# Altium PCB Placa.PcbDoc
Units mm, origin at the board's own origin, x right, y up, seen from the top; angles counter-clockwise.
Board outline 167.5 x 142.5 mm, 2 copper layers (Top Layer, Bottom Layer); 43 components, 45 nets, 168 pads, 17 vias.
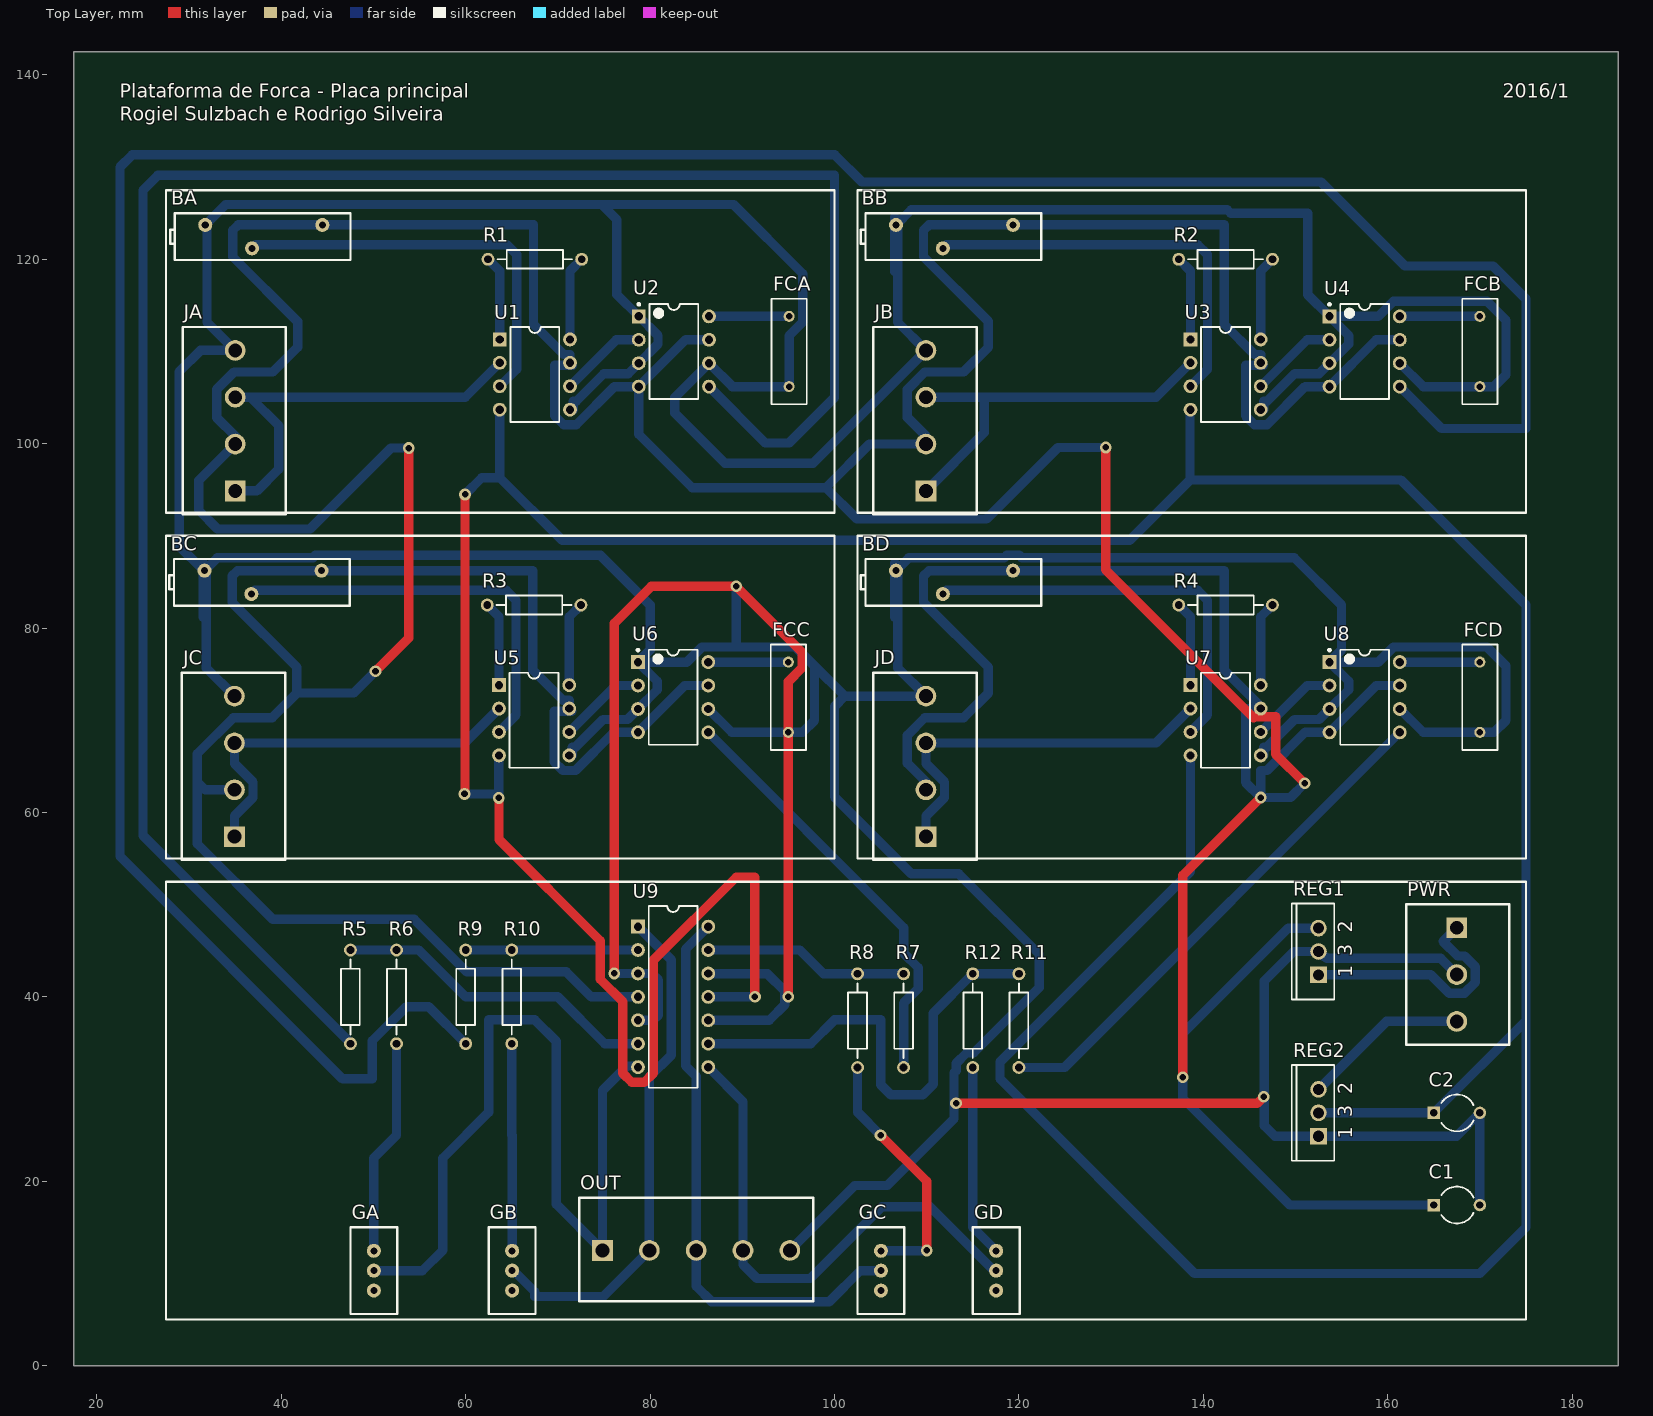
[diagram p0: Top Layer view]
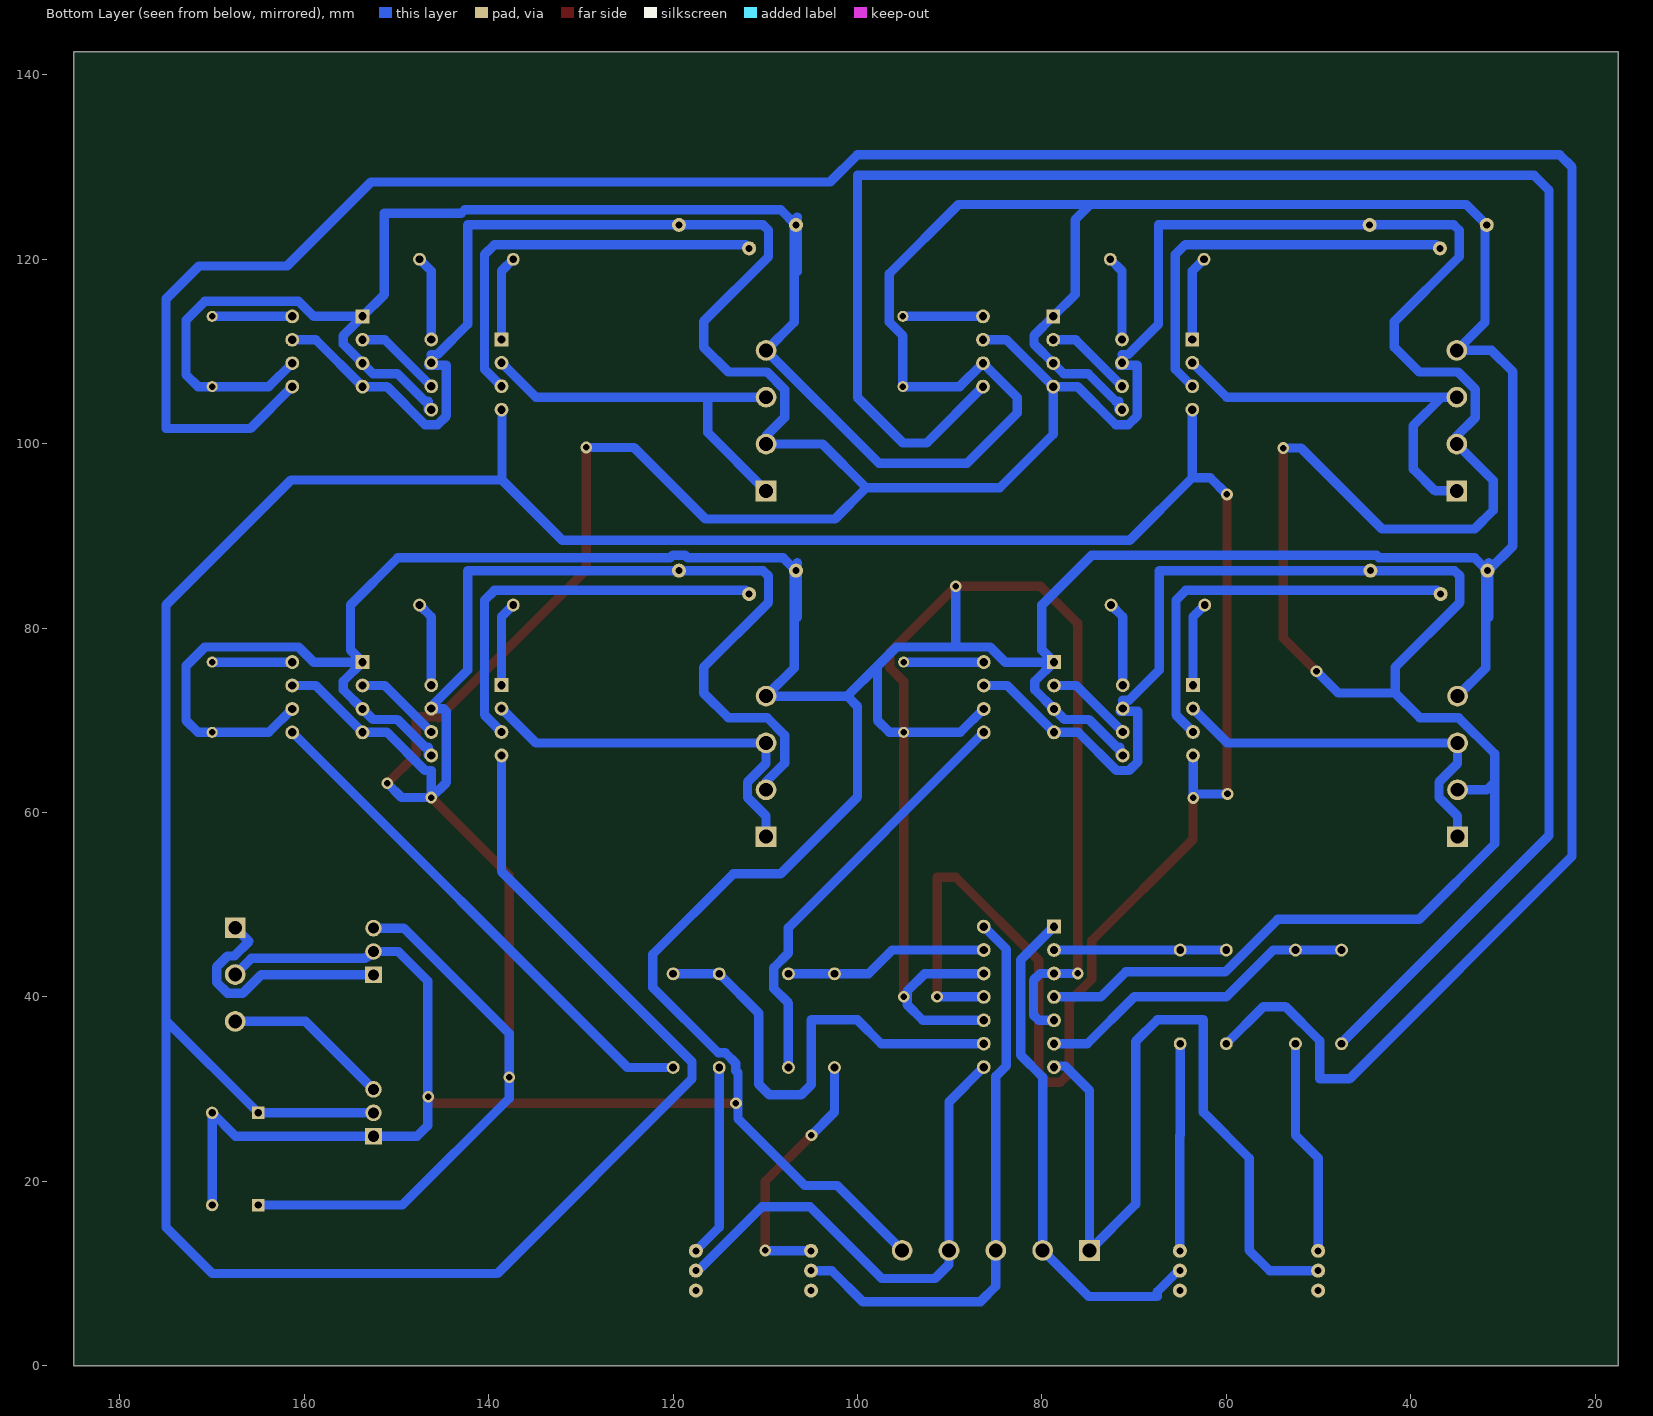
[diagram p1: Bottom Layer view, seen from below]

## Layer stack, top to bottom
Top Solder: solder mask 0.0102, Solder Resist, Dk 3.5
Top Layer: signal copper 0.0356
Dielectric 1: dielectric 0.32, FR-4, Dk 4.8
Bottom Layer: signal copper 0.0356
Bottom Solder: solder mask 0.0102, Solder Resist, Dk 3.5

## Board outline
20,142.5 185,142.5 185,0 17.5,0 17.5,142.5

## Design rules (kind name [scope] priority, off if disabled: settings)
Clearance [All] p1: gap=0.381
ComponentClearance [All] p1: gap=5 collisioncheckmode=3 verticalgap=0.254 showdistances=FALSE
PolygonConnect [All] p1: connectstyle=Relief reliefconductorwidth=0.254 reliefentries=4 polygonreliefangle="90 Angle" airgapwidth=0.254
RoomDefinition "Célula 4" [InComponentClass('Célula 4')] p1: confinementstyle=ConfineIn formatcopy=TRUE lockcomponents=FALSE outline 102.5,55 175,55 175,90 102.5,90
RoomDefinition "Célula 3" [InComponentClass('Célula 3')] p2: confinementstyle=ConfineIn formatcopy=TRUE lockcomponents=FALSE outline 27.5,55 100,55 100,90 27.5,90
RoomDefinition "Célula 2" [InComponentClass('Célula 2')] p3: confinementstyle=ConfineIn formatcopy=TRUE lockcomponents=FALSE outline 102.5,92.5 175,92.5 175,127.5 102.5,127.5
RoomDefinition "Estágio 1 - Diferencial" [InComponentClass('Estágio 1 - Diferencial')] p4: confinementstyle=ConfineIn formatcopy=TRUE lockcomponents=FALSE outline 27.5,4.92 175,4.92 175,52.46 27.5,52.46
RoomDefinition "Célula 1" [InComponentClass('Célula 1')] p5: confinementstyle=ConfineIn formatcopy=TRUE lockcomponents=FALSE outline 27.58,92.5 100.08,92.5 100.08,127.5 27.58,127.5
RoutingTopology [All] p1: topology=Daisy_Simple
RoutingVias [All] p1: holewidth=0.711 width=1.27 viastyle="Through Hole" minholewidth=0.711 minwidth=1.27 maxholewidth=0.711 maxwidth=1.27
SolderMaskExpansion [All] p1: expansion=0.102
Width [All] p1: maxlimit=1.016 minlimit=1.016 preferedwidth=1.016
28 further rules are at their usual default settings.

## Classes and differential pairs
component class "Célula 3": BC FCC JC R3 U5 U6
component class "Célula 2": BB FCB JB R2 U3 U4
component class "Célula 1": BA FCA JA R1 U1 U2
component class "Estágio 1 - Diferencial": C1 C2 GA GB GC GD OUT PWR R5 R6 R7 R8 R9 R10 R11 R12 REG1 REG2 U9
component class "Célula 4": BD FCD JD R4 U7 U8

## Components (designator, comment, footprint, x,y, rotation, side; value= is the part's Value field where it differs from the comment)
BA "Res Tap" TSR3006 47.5,125 r180 top
BB "Res Tap" TSR3006 122.42,125 r180 top
BC "Res Tap" TSR3006 47.42,87.5 r180 top
BD "Res Tap" TSR3006 122.42,87.5 r180 top
C1 "Cap2" CAPR5-4X5 167.5,17.42 r0 top
C2 "Cap2" CAPR5-4X5 167.5,27.42 r0 top
FCA "Cap" RAD-0.3 95.08,110 r90 top
FCB "Cap" RAD-0.3 170,110 r90 top
FCC "Cap" RAD-0.3 95,72.5 r90 top
FCD "Cap" RAD-0.3 170,72.5 r90 top
GA "Res Tap" 3296W 47.5,15 r270 top
GB "Res Tap" 3296W 62.5,15 r270 top
GC "Res Tap" 3296W 102.5,15 r270 top
GD "Res Tap" 3296W 115,15 r270 top
JA "691244510004" 691244510004 35,102.5 r90 top
JB "691244510004" 691244510004 109.92,102.5 r90 top
JC "691244510004" 691244510004 34.92,65 r90 top
JD "691244510004" 691244510004 109.92,65 r90 top
OUT "691244510005" 691244510005 85,12.5 r0 top
PWR "691244510003" 691244510003 167.5,42.42 r270 top
R1 "Res2" AXIAL-0.4 67.5,120 r180 top
R2 "Res2" AXIAL-0.4 142.42,120 r180 top
R3 "Res2" AXIAL-0.4 67.42,82.5 r180 top
R4 "Res2" AXIAL-0.4 142.42,82.5 r180 top
R5 "Res2" AXIAL-0.4 47.5,40 r90 top
R6 "Res2" AXIAL-0.4 52.5,40 r270 top
R7 "Res2" AXIAL-0.4 107.5,37.42 r90 top
R8 "Res2" AXIAL-0.4 102.5,37.42 r270 top
R9 "Res2" AXIAL-0.4 60,40 r90 top
R10 "Res2" AXIAL-0.4 65,40 r270 top
R11 "Res2" AXIAL-0.4 120,37.42 r90 top
R12 "Res2" AXIAL-0.4 115,37.42 r270 top
REG1 "L7805CP" ISOWATT220AB 152.5,44.92 r90 top
REG2 "L7905CP" ISOWATT220AB 152.5,27.42 r90 top
U1 "INA126PA" 006E 67.5,107.5 r270 top
U2 "MAX7410EPA" PA8 82.58,110 r0 top
U3 "INA126PA" 006E 142.42,107.5 r270 top
U4 "MAX7410EPA" PA8 157.5,110 r0 top
U5 "INA126PA" 006E 67.42,70 r270 top
U6 "MAX7410EPA" PA8 82.5,72.5 r0 top
U7 "INA126PA" 006E 142.42,70 r270 top
U8 "MAX7410EPA" PA8 157.5,72.5 r0 top
U9 "TL084N" N014 82.5,40 r270 top

## Footprints (in the part's own frame and the unit in brackets; to place one, negate y for a bottom-side part, rotate by r counter-clockwise, add the part's x,y. Pads: shape width x height; smd on the part's side, far side on the other; paste and mask are expansions set on the pad)
006E [mm] "DIP; 8 Leads; Row Spacing 7.62 mm; Pitch 2.54 mm"
  rect 1.5x1.5 hole 0.9: 1(-3.81,-3.81)
  round 1.5 hole 0.9: 2(-1.27,-3.81) 3(1.27,-3.81) 4(3.81,-3.81) 5(3.81,3.81) 6(1.27,3.81) 7(-1.27,3.81) 8(-3.81,3.81)
  silkscreen extent -5.15,-2.65 5.15,2.65
3296W [mil]
  round 60 hole 30: 1(270,100) 2(100,100) 3(185,100)
  silkscreen extent 0,0 370,200
691244510003 [mm] "Serie 2445 - 5.08 mm _ 3 pins"
  rect 2.25x2.25 hole 1.5: 1(-5.08,0)
  round 2.25 hole 1.5: 2(0,0) 3(5.08,0)
  silkscreen extent -7.62,-5.5 7.62,5.7
691244510004 [mm] "Serie 2445 - 5.08 mm _ 4 pins"
  rect 2.25x2.25 hole 1.5: 1(-7.62,0)
  round 2.25 hole 1.5: 2(-2.54,0) 3(2.54,0) 4(7.62,0)
  silkscreen extent -10.16,-5.5 10.16,5.7, body extent -10.21,-5.55 10.11,5.65, height 18.1
691244510005 [mm] "Serie 2445 - 5.08 mm _ 5 pins"
  rect 2.25x2.25 hole 1.5: 1(-10.16,0)
  round 2.25 hole 1.5: 2(-5.08,0) 3(0,0) 4(5.08,0) 5(10.16,0)
  silkscreen extent -12.7,-5.5 12.7,5.7, body extent -12.7,-5.5 12.7,5.7, height 18.1
AXIAL-0.4 [mm] "Axial Device, Thru-Hole; 2 Leads; 0.4 in Pin Spacing"
  round 1.4 hole 0.85: 1(-5.08,0) 2(5.08,0)
  silkscreen extent -4.06,-1.02 4.06,1.02
CAPR5-4X5 [mm] "Capacitor; 2 Leads"
  rect 1.35x1.35 hole 0.8: 1(-2.5,0)
  round 1.35 hole 0.8: 2(2.5,0)
  silkscreen extent -1.69,-2 1.82,2
ISOWATT220AB [mm] "TO, Thru-Hole, Vertical, Heatsink Mounted; 3 In-Line Leads; Pitch 2.54 mm; Pin sequence 1, 3, 2"
  rect 1.8x1.8 hole 1.2: 1(-2.54,0)
  round 1.8 hole 1.2: 2(2.54,0) 3(0,0)
  silkscreen extent -5.2,-1.7 5.2,2.9
N014 [mm] "DIP; 14 Leads; Row Spacing 7.62 mm; Pitch 2.54 mm"
  rect 1.5x1.5 hole 0.9: 1(-7.62,-3.81)
  round 1.5 hole 0.9: 2(-5.08,-3.81) 3(-2.54,-3.81) 4(0,-3.81) 5(2.54,-3.81) 6(5.08,-3.81) 7(7.62,-3.81) 8(7.62,3.81) 9(5.08,3.81) 10(2.54,3.81) 11(0,3.81) 12(-2.54,3.81) 13(-5.08,3.81) 14(-7.62,3.81)
  silkscreen extent -9.85,-2.65 9.85,2.65
PA8 [mm] "DIP, 8-Leads, Row Spacing 7.62mm, Pitch 2.54mm, Body 9.38x7.24mm"
  rect 1.5x1.5 hole 0.9: 1(-3.81,3.81)
  round 1.5 hole 0.9: 2(-3.81,1.27) 3(-3.81,-1.27) 4(-3.81,-3.81) 5(3.81,-3.81) 6(3.81,-1.27) 7(3.81,1.27) 8(3.81,3.81)
  silkscreen extent -3.93,-5.15 2.65,5.23, body extent -3.6,-5.15 3.6,5.15, height 4.58
RAD-0.3 [mm] "Radial Cap, Thru-Hole; 2 Leads; 0.3 in Pin Spacing"
  round 1.2 hole 0.7: 1(-3.81,0) 2(3.81,0)
  silkscreen extent -5.72,-1.91 5.71,1.9
TSR3006 [mil]
  round 60 hole 30: 1(620,50) 2(120,50) 3(420,150)
  silkscreen extent 0,0 770,200

## Part data
BA BB BC BD GA GB GC GD: "Tapped Resistor"
C1 C2 FCA FCB FCC FCD: "Capacitor"
JA JB JC JD OUT PWR: "WR-TBL Horizontal Cable Entry With Rising Cage Clamp,Serie 2445 - 5.08 mm"
R1 R2 R3 R4 R5 R6 R7 R8 R9 R10 R11 R12: "Resistor"
REG1: "Positive Voltage Regulator"
REG2: "Negative Voltage Regulator"
U1 U3 U5 U7: "Precision, Low-Power Instrumentation Amplifiers"
U2 U4 U6 U8: "5th-Order, Lowpass, Switched-Capacitor Filter"
U9: "JFET-Input Operational Amplifier"

## Via types
v1: diameter 1.27, hole 0.711, Top Layer to Bottom Layer, 16 vias
v2: diameter 1.27, hole 0.711, Top Layer to Bottom Layer, tented top, 1 vias

## Nets (pads, with @x,y where several pads share a name; then routed paths per layer and width w, separated by ;. In a path a pad name is that pad's centre, name@x,y a point inside that pad or via, vN(x,y) a via of type N, cw(c..) or ccw(c..) an arc to the next point about the centre after c; other vN are vias at no path point)
-VCC: C2.1 REG2.3 U1.4 U3.4 U5.4 U7.4 U9.11 | length 472.7
  Top Layer w1.016: v1(59.869,62.01) 59.932,62.01 v1(59.932,94.494) ; v1(63.584,61.579) 63.61,61.606 63.61,61.579 63.61,57.073 74.605,46.079 74.605,41.909 77.051,39.462 77.051,31.701 78.011,30.741 79.369,30.741 80.329,31.701 80.329,43.957 89.355,52.983 91.371,52.983 v1(91.371,40)
  Bottom Layer w1.016: v1(59.869,62.01) v1@63.153,62.01 ; v1(59.932,94.494) 61.748,96.31 63.69,96.31 ; v1(63.584,61.579) U5.4@63.584,66.164 ; U1.4 63.69,96.31 ; U9.11 v1(91.371,40) ; U7.4 138.61,53.61 117.948,32.948 117.948,31.11 139.057,10 170,10 175,15 175,37.42 ; U3.4 138.563,103.643 138.563,96.063 ; REG2.3 C2.1 175,37.42 ; 63.69,96.31 70.459,89.541 132.041,89.541 138.563,96.063 ; 138.563,96.063 161.437,96.063 175,82.5 175,37.42
CELLA: R5.1 U2.5 | length 219.8
  Bottom Layer w1.016: R5.1@47.5,35 25,57.5 25,127.5 26.619,129.119 100,129.119 100,105 95.08,100.08 92.5,100.08 U2.5
CELLB: R9.1 U4.5 | length 318.7
  Bottom Layer w1.016: R9.1 55.972,38.948 53.588,38.948 49.875,35.235 49.875,31.102 46.653,31.102 22.5,55.255 22.5,130 23.822,131.322 100.034,131.322 102.972,128.385 152.769,128.385 161.876,119.277 171.424,119.277 175,115.701 175,101.65 165.85,101.65 U4.5
CELLC: R7.1 U6.5 | length 46.4
  Bottom Layer w1.016: U6.5 107.5,47.5 107.5,44.747 109.089,43.158 109.089,40.911 107.5,39.322 R7.1
CELLD: R11.1 U8.5 | length 56.4
  Bottom Layer w1.016: R11.1 124.96,32.34 U8.5
GND: BA.1 BB.1 BC.1 BD.1 C1.2 C2.2 FCA.1 FCB.1 FCC.1 FCD.1 JA.4 JB.4 JC.4 JD.4 OUT.5 PWR.2 REG1.3 REG2.1 U1.5 U2.1 U2.3 U2.6 U3.5 U4.1 U4.3 U4.6 U5.5 U6.1 U6.3 U6.6 U7.5 U8.1 U8.3 U8.6 U9.3 U9.5 U9.10 U9.12 | length 960.2
  Top Layer w1.016: v1(76.129,42.54) 76.129,80.535 80.141,84.547 v1(89.332,84.547) 96.489,77.39 96.489,75.693 95,74.204 FCC.1 v1(95,40) ; v1(113.188,28.468) 145.87,28.468 v1(146.553,29.151)
  Bottom Layer w1.016: 31.526,81.176 31.526,86.23 BC.1@31.526,86.293 ; 31.526,87.089 BC.1@31.526,86.293 ; BC.1@31.589,86.23 BC.1@31.526,86.293 ; JC.4 31.863,75.677 31.863,86.039 BC.1 33.069,87.627 43.434,87.627 43.688,87.881 74.619,87.881 80,82.5 80,77.62 U6.1 ; U5.5 71.572,66.19 71.572,67.091 71.909,67.091 74.905,70.087 77.547,70.087 U6.3 80.777,73.317 80.777,74.223 U6.1 ; U1.5 71.652,103.69 71.652,104.591 71.989,104.591 74.985,107.587 77.627,107.587 U2.3 80.857,110.817 80.857,111.723 U2.1 76.397,116.183 76.397,124.309 74.763,125.943 ; v1(76.129,42.54) U9.3 80.187,42.54 80.908,41.82 80.908,38.033 80.335,37.46 U9.5 ; U9.10 92.923,37.46 94.622,39.16 94.622,40 94.622,40.603 92.731,42.494 U9.12@86.31,42.494 ; U6.6 88.85,68.69 FCC.1 96.54,68.69 97.836,69.986 97.836,75.899 ; v1(89.332,84.547) 89.332,77.949 ; OUT.5 102.195,19.535 105.712,19.535 112.963,26.786 112.963,28.468 112.963,31.774 113.194,32.005 113.194,32.781 114.342,33.929 115.118,33.929 122.2,41.01 122.2,44.613 113.471,53.341 108.345,53.341 100,61.686 100,71.506 101.114,72.62 ; 106.526,81.176 106.526,86.23 106.526,87.089 ; 106.526,118.676 106.526,123.73 106.526,124.589 ; U7.5 146.572,66.19 146.572,67.091 146.909,67.091 149.905,70.087 152.547,70.087 U8.3 155.777,73.317 155.777,74.223 U8.1 ; U3.5 146.572,103.69 146.572,104.591 146.909,104.591 149.905,107.587 152.547,107.587 U4.3 155.777,110.817 155.777,111.723 U4.1 ; U8.6 163.85,68.69 FCD.1 171.54,68.69 172.836,69.986 172.836,75.899 170.785,77.949 160.631,77.949 158.992,76.31 U8.1 ; U4.6 163.85,106.19 FCB.1 171.54,106.19 172.836,107.486 172.836,113.399 170.785,115.449 160.631,115.449 158.992,113.81 U4.1 ; PWR.2 165.751,44.169 153.408,44.169 153.202,44.375 153.045,44.375 REG1.3 149.827,44.92 146.621,41.714 146.621,29.151 146.621,26.038 147.779,24.88 REG2.1 167.46,24.88 C2.2 C1.2 ; BC.1@31.526,86.293 28.914,88.905 28.914,107.795 31.24,110.12 JA.4 31.943,113.177 31.943,123.539 BA.1 33.965,125.943 74.763,125.943 ; 74.763,125.943 89.057,125.943 96.569,118.431 96.569,113.193 95.08,111.704 FCA.1 88.93,106.19 U2.6 82.667,105.007 82.667,103.333 88.129,97.871 97.671,97.871 JB.4 106.863,113.177 106.863,123.539 BB.1 108.323,125.381 142.598,125.381 142.979,125 151.317,125 151.317,116.183 U4.1 ; U6.1 83.992,76.31 85.631,77.949 89.332,77.949 ; 89.332,77.949 95.785,77.949 97.836,75.899 ; 97.836,75.899 101.114,72.62 ; 101.114,72.62 JD.4 106.863,75.677 106.863,86.039 BD.1 108.069,87.627 118.434,87.627 118.688,87.881 120.056,87.881 120.31,87.627 149.873,87.627 155,82.5 155,77.62 U8.1
NetBA_3: BA.3 U1.3 | length 44.4
  Bottom Layer w1.016: BA.3 37.231,121.589 64.468,121.589 65.543,120.514 65.543,108.083 U1.3
NetBB_3: BB.3 U3.3 | length 44.4
  Bottom Layer w1.016: BB.3 112.151,121.589 139.388,121.589 140.463,120.514 140.463,108.083 U3.3
NetBC_3: BC.3 U5.3 | length 44.4
  Bottom Layer w1.016: BC.3 37.151,84.089 64.388,84.089 65.463,83.014 65.463,70.583 U5.3
NetBD_3: BD.3 U7.3 | length 44.4
  Bottom Layer w1.016: BD.3 112.151,84.089 139.388,84.089 140.463,83.014 140.463,70.583 U7.3
NetFCA_2: FCA.2 U2.8 | length 8.7
  Bottom Layer w1.016: U2.8 FCA.2
NetFCB_2: FCB.2 U4.8 | length 8.7
  Bottom Layer w1.016: U4.8 FCB.2
NetFCC_2: FCC.2 U6.8 | length 8.7
  Bottom Layer w1.016: U6.8 FCC.2
NetFCD_2: FCD.2 U8.8 | length 8.7
  Bottom Layer w1.016: U8.8 FCD.2
NetGA_2: GA.2 R6.2 | length 23.5
  Bottom Layer w1.016: GA.2 50.04,22.46 50,22.5 52.5,25 R6.2
NetGB_2: GB.2 R10.2 | length 22.5
  Bottom Layer w1.016: R10.2 65,25 65.04,24.96 GB.2
NetGC_2: GC.2 R8.2 | length 27.9
  Top Layer w1.016: v1(105,25) 110,20 v1(110,12.5)
  Bottom Layer w1.016: R8.2 102.5,27.5 v1(105,25) ; GC.2 109.96,12.46 v1(110,12.5)
NetGD_2: GD.2 R12.2 | length 20.9
  Bottom Layer w1.016: R12.2 115,15 GD.2
NetJA_1: JA.1 JA.3 U1.2 | length 45
  Bottom Layer w1.016: JA.1 37.356,94.88 39.719,97.243 39.719,101.961 36.64,105.04 ; JA.3 36.64,105.04 ; U1.2 59.96,105.04 36.64,105.04
NetJB_1: JB.1 JB.3 U3.2 | length 42.9
  Bottom Layer w1.016: JB.1 116.252,101.212 116.252,104.943 ; JB.3 134.88,105.04 U3.2
NetJC_1: JC.1 JC.3 U5.2 | length 42.1
  Bottom Layer w1.016: JC.1 34.92,59.612 36.934,61.626 36.934,63.294 34.92,65.308 JC.3 59.88,67.54 U5.2
NetJD_1: JD.1 JD.3 U7.2 | length 42.1
  Bottom Layer w1.016: JD.1 109.92,59.612 111.934,61.626 111.934,63.294 109.92,65.308 JD.3 134.88,67.54 U7.2
NetPWR_1: PWR.1 REG1.1 | length 26.7
  Bottom Layer w1.016: REG1.1 164.692,42.38 166.666,40.406 168.334,40.406 169.514,41.586 169.514,43.254 168.334,44.434 167.598,44.434 166.016,46.016 PWR.1
NetPWR_3: PWR.3 REG2.2 | length 18.1
  Bottom Layer w1.016: REG2.2 159.88,37.34 PWR.3
NetR1_1: R1.1 U1.8 | length 9.2
  Bottom Layer w1.016: U1.8 71.31,118.73 R1.1
NetR1_2: R1.2 U1.1 | length 9.2
  Bottom Layer w1.016: R1.2 63.69,118.73 U1.1
NetR2_1: R2.1 U3.8 | length 9.2
  Bottom Layer w1.016: U3.8 146.23,118.73 R2.1
NetR2_2: R2.2 U3.1 | length 9.2
  Bottom Layer w1.016: R2.2 138.61,118.73 U3.1
NetR3_1: R3.1 U5.8 | length 9.2
  Bottom Layer w1.016: U5.8 71.23,81.23 R3.1
NetR3_2: R3.2 U5.1 | length 9.2
  Bottom Layer w1.016: R3.2 63.61,81.23 U5.1
NetR4_1: R4.1 U7.8 | length 9.2
  Bottom Layer w1.016: U7.8 146.23,81.23 R4.1
NetR4_2: R4.2 U7.1 | length 9.2
  Bottom Layer w1.016: R4.2 138.61,81.23 U7.1
NetR5_2: R5.2 R6.1 U9.6 | length 35.4
  Bottom Layer w1.016: R5.2 R6.1 ; R6.1 54.92,45.08 60,40 70,40 75.08,34.92 U9.6
NetR7_2: R7.2 R8.1 U9.13 | length 22.3
  Bottom Layer w1.016: U9.13 96.23,45.08 98.81,42.5 R8.1 R7.2
NetR9_2: R9.2 R10.1 U9.2 | length 18.7
  Bottom Layer w1.016: R9.2 65,45.08 U9.2
NetR11_2: R11.2 R12.1 U9.9 | length 52.2
  Bottom Layer w1.016: U9.9 97.42,34.92 100,37.5 105,37.5 105,30.485 106.086,29.398 109.593,29.398 110.7,30.505 110.7,38.2 R12.1 R11.2
NetU1_6: U1.6 U2.2 | length 9.5
  Bottom Layer w1.016: U1.6 76.35,111.27 U2.2
NetU3_6: U3.6 U4.2 | length 9.5
  Bottom Layer w1.016: U3.6 151.27,111.27 U4.2
NetU5_6: U5.6 U6.2 | length 9.5
  Bottom Layer w1.016: U5.6 76.27,73.77 U6.2
NetU7_6: U7.6 U8.2 | length 9.5
  Bottom Layer w1.016: U7.6 151.27,73.77 U8.2
OUTA: GA.3 OUT.1 U9.7 | length 90.7
  Bottom Layer w1.016: GA.3 55.301,10.301 57.5,12.5 57.5,22.5 62.5,27.5 62.5,37.5 67.5,37.5 69.84,35.16 69.84,17.5 OUT.1 74.84,29.84 77.5,32.5 U9.7@78.57,32.5
OUTB: GB.3 OUT.2 U9.1 | length 56
  Bottom Layer w1.016: GB.3 65.216,10.301 67.5,8.017 67.5,7.5 74.92,7.5 OUT.2 79.92,31.292 82.309,33.681 82.309,44.002 U9.1
OUTC: GC.3 OUT.3 U9.14 | length 62.6
  Bottom Layer w1.016: U9.14 83.85,45.16 83.85,32.523 85,31.372 OUT.3 85,8.618 86.669,6.949 99.449,6.949 102.801,10.301 GC.3
OUTD: GD.3 OUT.4 U9.8 | length 57.1
  Bottom Layer w1.016: U9.8 90.08,28.61 OUT.4 90.08,10.969 91.591,9.458 97.382,9.458 105.151,17.228 110.363,17.228 117.289,10.301 GD.3
VCC: BA.2 BB.2 BC.2 BD.2 C1.1 JA.2 JB.2 JC.2 JD.2 REG1.2 U1.7 U2.4 U2.7 U3.7 U4.4 U4.7 U5.7 U6.4 U6.7 U7.7 U8.4 U8.7 U9.4 | length 805.9
  Top Layer w1.016: v2(50.22,75.329) 53.821,78.931 v1(53.821,99.526) ; v1(129.413,99.594) 129.413,86.308 145.341,70.38 145.452,70.269 145.551,70.369 146.23,70.369 147.869,70.369 147.869,66.301 v1(151.006,63.164) ; v1(137.786,31.288) 137.786,53.175 v1(146.23,61.62)
  Bottom Layer w1.016: JC.2 31.765,62.46 30.892,63.333 ; v2(50.22,75.329) 47.847,72.957 41.691,72.957 ; v1(53.821,99.526) 51.894,99.526 43.118,90.75 33.074,90.75 31.045,92.779 31.045,96.005 JA.2 35,100.833 32.986,102.847 32.986,105.874 34.883,107.771 39.086,107.771 41.771,110.457 41.771,113.257 34.743,120.286 34.743,123.143 35.33,123.73 BA.2 67.354,123.73 67.354,112.948 70.631,109.671 71.31,109.671 U1.7 ; U5.7 71.23,72.171 70.551,72.171 67.274,75.448 67.274,86.23 BC.2 35.25,86.23 34.663,85.643 34.663,82.786 41.691,75.757 41.691,72.957 ; U5.7@71.512,70.988 71.23,70.988 69.591,70.988 69.591,65.511 70.551,64.551 71.909,64.551 76.048,68.69 U6.4 83.77,73.77 U6.7 ; U1.7@71.592,108.488 71.31,108.488 69.671,108.488 69.671,103.011 70.631,102.051 71.989,102.051 76.128,106.19 U2.4 ; U9.4 73.621,40 70.89,42.73 60.102,42.73 54.428,48.404 39.096,48.404 30.892,56.608 30.892,63.333 ; U2.7 83.85,111.27 U2.4 ; JD.2 109.92,63.333 107.906,65.347 107.906,68.374 109.803,70.271 114.006,70.271 116.691,72.957 116.691,75.757 109.663,82.786 109.663,85.643 110.25,86.23 BD.2 142.274,86.23 142.274,75.448 145.551,72.171 146.23,71.492 U7.7 144.873,71.27 ; v1(129.413,99.594) 124.242,99.594 116.478,91.829 102.438,91.829 99.052,95.214 ; 144.591,70.988 144.591,63.259 v1(146.23,61.62) ; U3.7 146.23,109.671 145.551,109.671 142.274,112.948 142.274,123.73 BB.2 110.25,123.73 109.663,123.143 109.663,120.286 116.691,113.257 116.691,110.457 114.006,107.771 109.803,107.771 107.906,105.874 107.906,102.847 109.92,100.833 JB.2 103.798,99.96 99.052,95.214 ; U3.7@146.512,108.488 146.23,108.488 144.591,108.488 144.591,103.011 145.551,102.051 146.909,102.051 151.048,106.19 U4.4 158.77,111.27 U4.7 ; v1(151.006,63.164) 149.462,61.62 v1(146.23,61.62) ; REG1.2 149.213,47.46 144.235,42.483 137.786,36.033 v1(137.786,31.288) 137.786,29.016 149.381,17.42 C1.1 ; U8.7 158.77,73.77 U8.4 151.048,68.69 146.909,64.551 146.23,64.551 v1(146.23,61.62) ; 30.892,63.333 30.892,66.36 34.803,70.271 39.006,70.271 41.691,72.957 ; U2.4 78.77,101.03 84.586,95.214 99.052,95.214
pads on no net: GA.1 GB.1 GC.1 GD.1

## Silkscreen, mask and mechanical layers (free items; w line width, h text height)
Top Overlay:
  lines w0.254: 27.5,5 27.5,52.5 175,52.5 175,5 27.5,5 ; 27.5,55 100,55 100,90 27.5,90 27.5,55 ; 27.5,92.5 100,92.5 100,127.5 27.5,127.5 27.5,92.5 ; 102.5,55 175,55 175,90 102.5,90 102.5,55 ; 102.5,92.5 175,92.5 175,127.5 102.5,127.5 102.5,92.5
  text "Plataforma de Forca - Placa principal" at 22.5,137.5 h1.52
  text "2016/1" at 172.5,137.5 h1.52
  text "Rogiel Sulzbach e Rodrigo Silveira" at 22.5,135 h1.52
Mechanical 1:
  lines w0.2: 20,2.5 20,140 182.5,140 182.5,2.5
  lines w0.254: 20,2.5 182.5,2.5

## Text inside footprints (layer, text, board x,y; h text height)
REG1: Top Overlay "1" at 156.175,42.13 h1.5 r90; Top Overlay "2" at 156.175,46.96 h1.5 r90; Top Overlay "3" at 156.175,44.42 h1.5 r90
REG2: Top Overlay "1" at 156.175,24.63 h1.5 r90; Top Overlay "2" at 156.175,29.46 h1.5 r90; Top Overlay "3" at 156.175,26.92 h1.5 r90